# Allegro board KYO_BFHJX_V1.1.brd
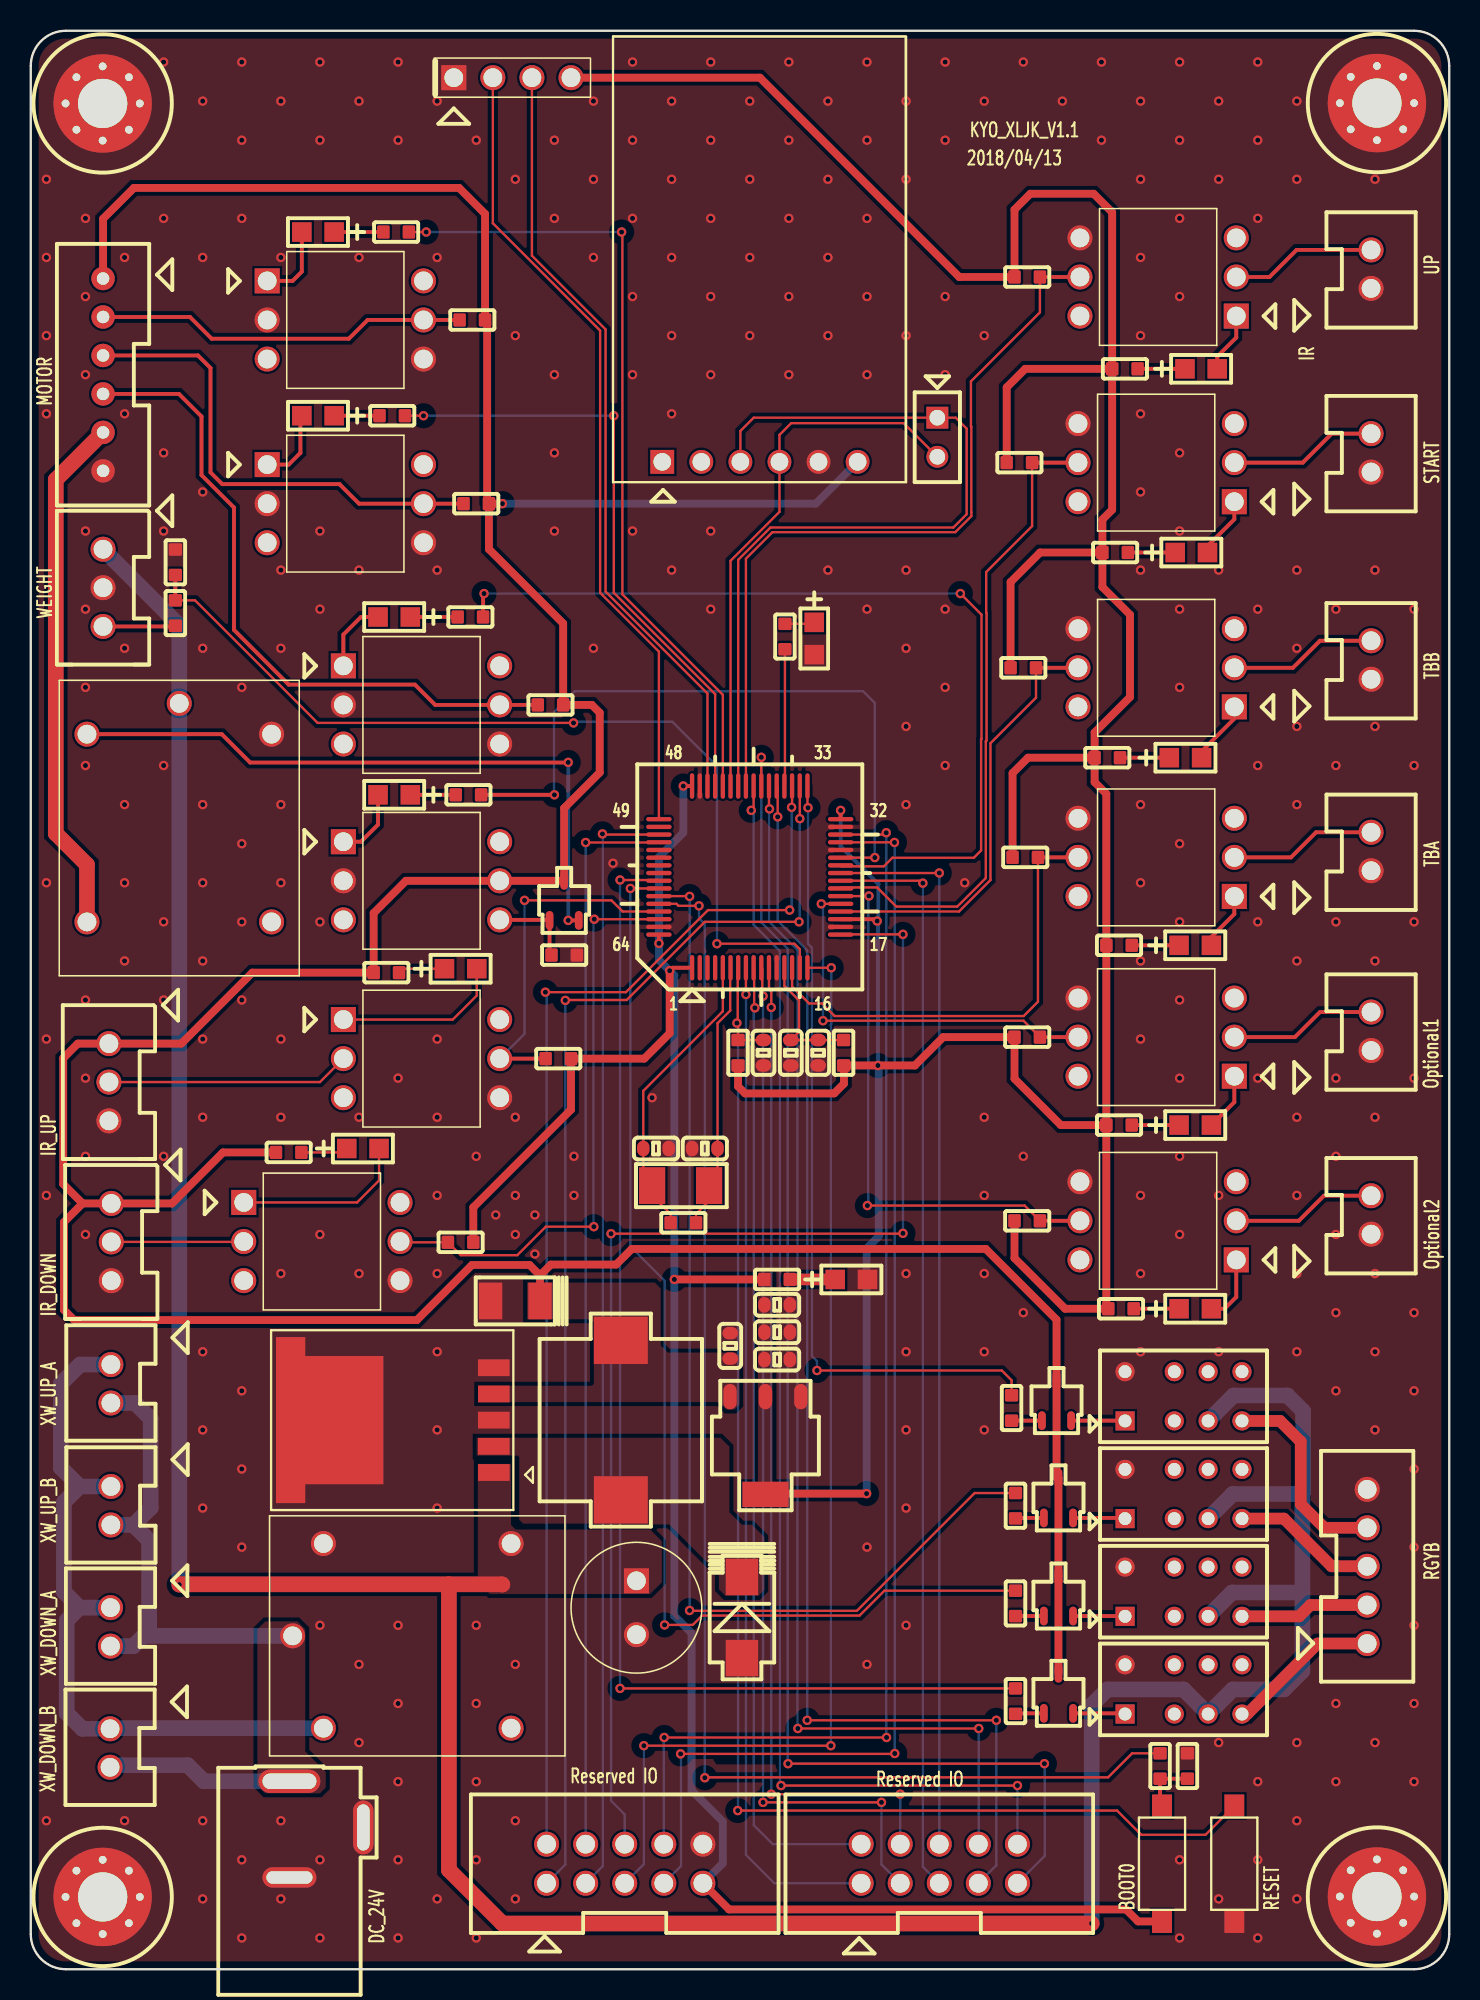
[diagram p0: board, top side]
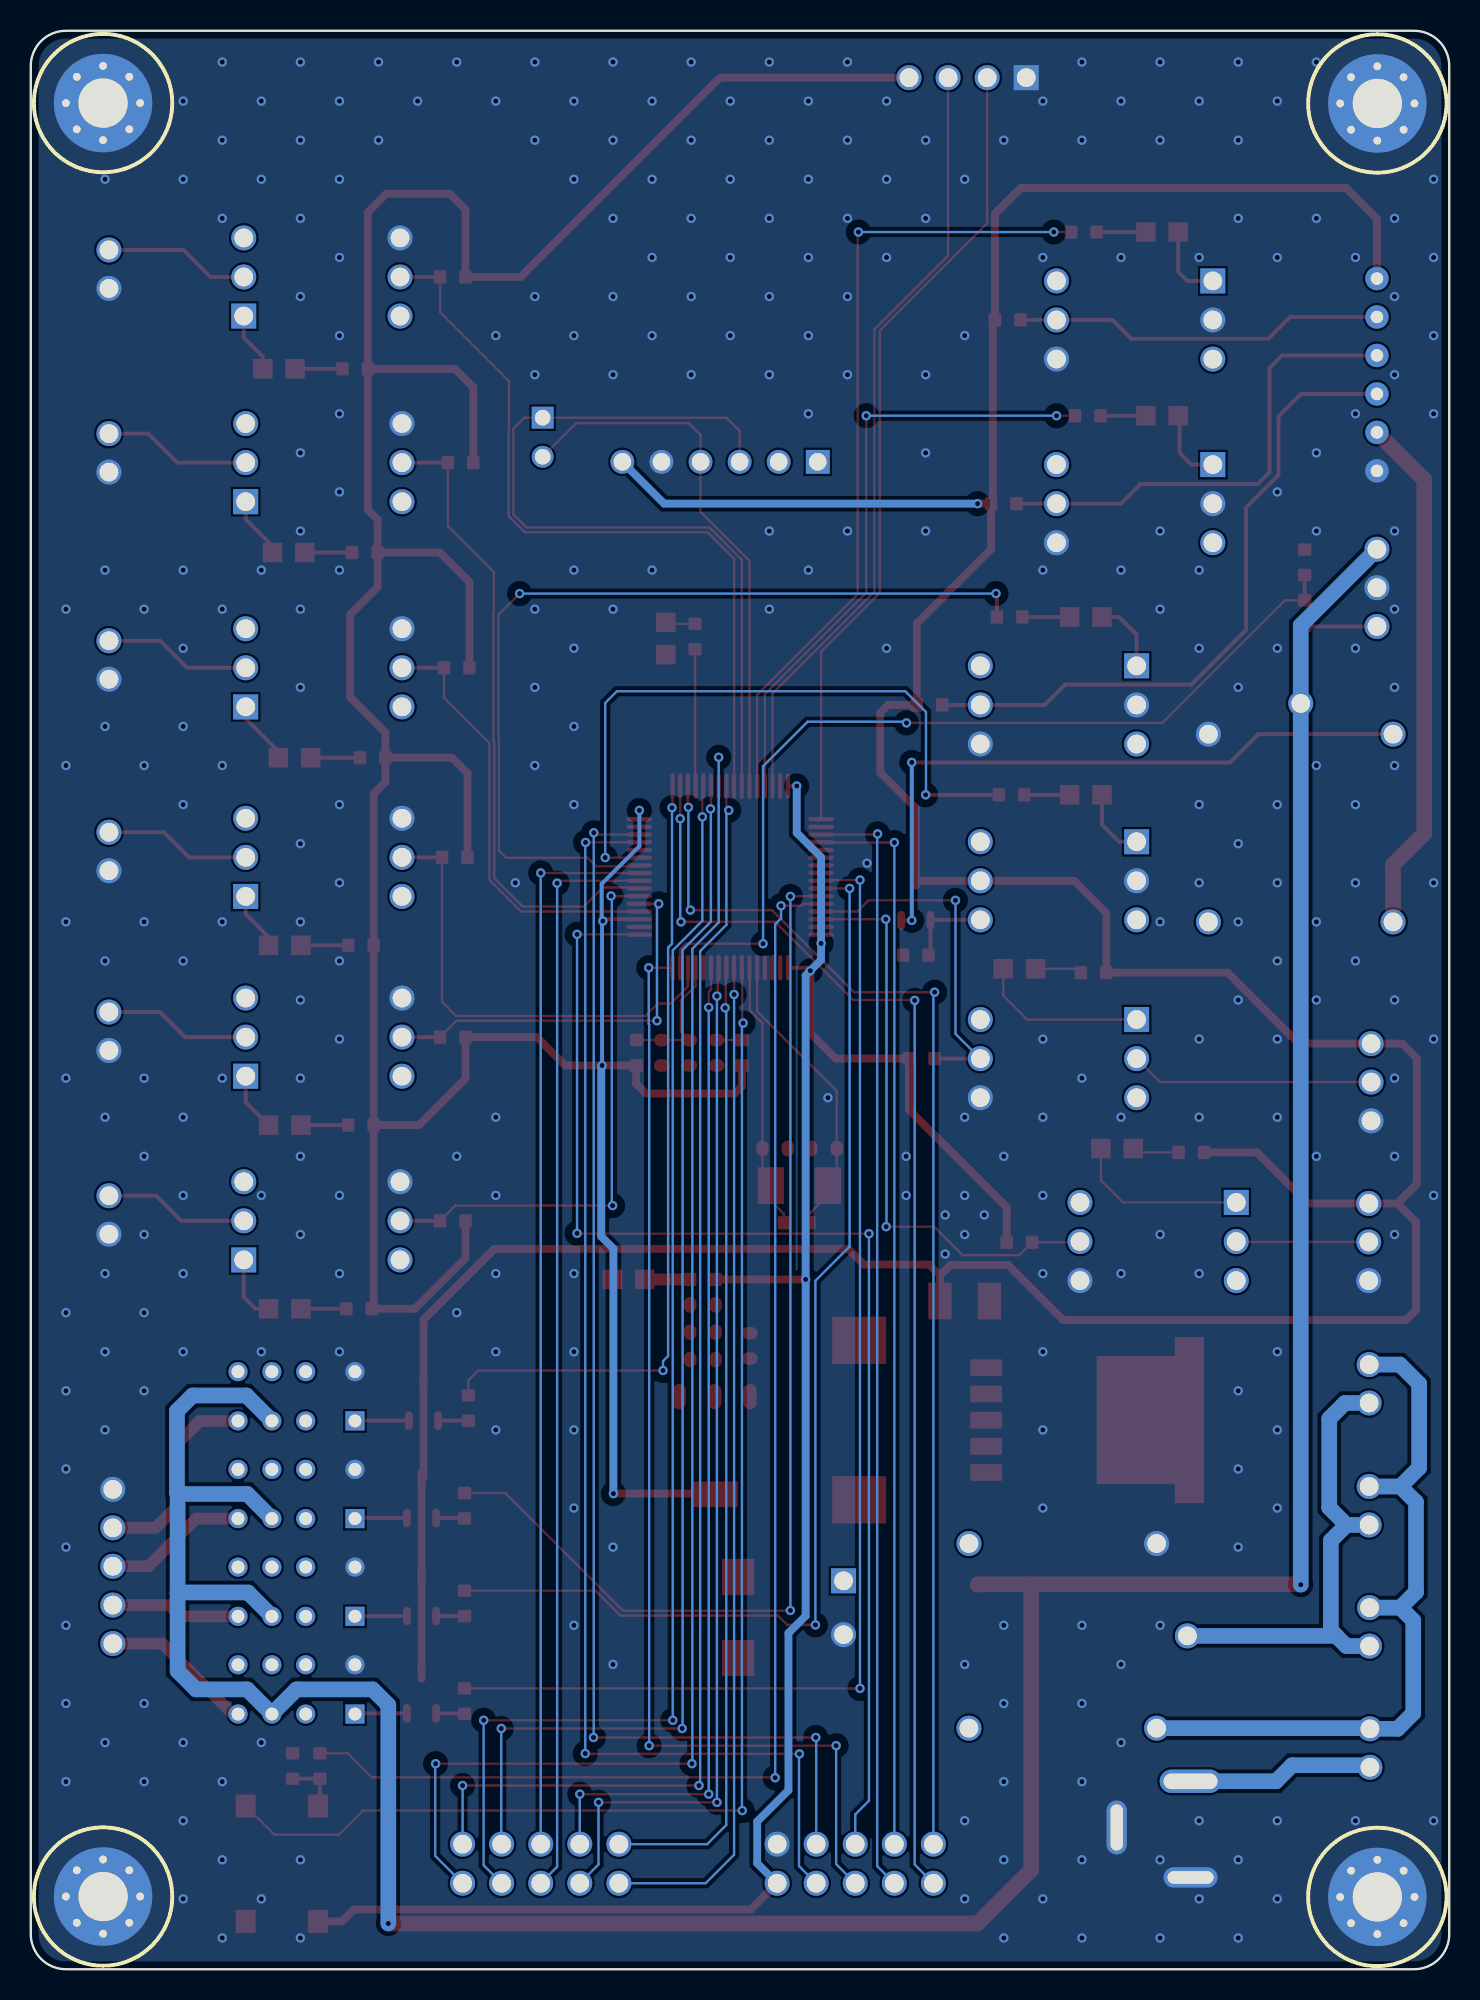
[diagram p1: board, bottom side, seen from below]

Outline 92.2 x 125.98 mm; copper layers: TOP, BOTTOM. Coordinates in mm from the lower left corner of the outline.
Outline path: 0,123.7 arc(0.67,125.31) 2.29,125.98 89.92,125.98 arc(91.53,125.31) 92.2,123.7 92.2,2.29 arc(91.53,0.67) 89.92,0 2.29,0 arc(0.67,0.67) 0,2.29 0,123.7

## Placement (name value [footprint] x y rotation side)
C1  20pF  [C0603]  40.64 53.34 270 top
C2  20pF  [C0603]  43.81 53.34 90 top
C3  0.1uF  [C0603]  47.62 59.56 0 top
C4  680uF  [220UF_35V_35]  39.37 23.5 270 top
C5  220uF  [C_2P_127_138X110]  31.5 43.43 180 top
C6  0.1uF  [C0603]  45.47 40.51 180 top
C7  1uF  [C0603]  48.51 43.18 90 top
C8  0.1uF  [C0603]  48.51 41.4 90 top
C9  0.1uF  [C0603]  48.51 39.62 90 top
C10  0.1uF  [C0603]  49.4 59.56 0 top
C11  1uF  [C0603]  51.18 59.56 0 top
CN1  DCJACK_3  [DC-PWR-JD]  16.81 12.21 270 top
D1  1N5824  [DIODE_2P_175_213X155]  46.23 22.86 180 top
D2  HSMY-C170  [LED_0805]  53.34 44.83 0 top
D3  HSMY-C170  [LED_0805]  50.93 86.49 270 top
D4  HSMY-C170  [LED_0805]  75.69 66.55 0 top
D5  HSMY-C170  [LED_0805]  75.69 54.86 0 top
D6  HSMY-C170  [LED_0805]  75.44 92.08 0 top
D7  HSMY-C170  [LED_0805]  75.06 78.74 0 top
D8  HSMY-C170  [LED_0805]  75.69 42.93 0 top
D9  HSMY-C170  [LED_0805]  76.07 104.01 0 top
D10  HSMY-C170  [LED_0805]  18.67 112.9 180 top
D11  HSMY-C170  [LED_0805]  18.67 100.97 180 top
D12  HSMY-C170  [LED_0805]  23.62 87.88 180 top
D13  HSMY-C170  [LED_0805]  23.62 76.33 180 top
D15  HSMY-C170  [LED_0805]  27.94 65.02 0 top
D16  HSMY-C170  [LED_0805]  21.59 53.34 0 top
H1  -  [H32P64I8-NBS_SMB30]  4.67 4.7 0 top
H2  -  [H32P64I8-NBS_SMB30]  87.5 4.72 0 top
H3  -  [H32P64I8-NBS_SMB30]  87.5 121.29 0 top
H4  -  [H32P64I8-NBS_SMB30]  4.67 121.26 0 top
J1  SW_UP  [XH254_2]  5.16 14.38 270 top
J2  SW_UP  [XH254_2]  5.18 22.25 270 top
J3  -  [XH254_3]  5.08 57.66 270 top
J4  -  [XH254_3]  5.23 47.27 270 top
J5  SW_DOWN  [XH254_2]  5.21 30.12 270 top
J6  SW_DOWN  [XH254_2]  5.21 38.05 270 top
J7  -  [XH254_3]  4.7 89.79 270 top
J8  JTAG_10P  [JTAG_10]  59.05 6.86 90 top
J9  JUMP_2x1  [HD_2X1P_100_D]  58.93 99.57 270 top
J10  JTAG_10P  [JTAG_10]  38.61 6.86 90 top
J11  JUMP_1x4  [HD_1X4_254]  27.5 122.94 0 top
J12  TBA  [XH254_2]  87.12 72.64 90 top
J13  optional1  [XH254_2]  87.12 60.96 90 top
J14  start  [XH254_2]  87.12 98.55 90 top
J15  TBB  [XH254_2]  87.12 85.09 90 top
J16  optional2  [XH254_2]  87.12 49.02 90 top
J17  up  [XH254_2]  87.12 110.49 90 top
J18  -  [XH254_5]  86.87 26.19 90 top
J19  -  [XH254_6]  4.7 103.63 270 top
L1  2.2uH  [INDUCTOR_2P_408_453X406]  38.35 35.69 90 top
NOREF  -  []  30.1 37.39 90 top
NOREF#2  -  []  3.65 68.07 90 top
NOREF#3  -  []  19.43 35.69 0 top
NOREF#4  -  []  4.7 89.79 90 top
NOREF#5  -  []  92.2 2.29 90 top
NOREF#6  -  []  87.12 47.77 90 top
NOREF#7  -  []  5.21 36.8 90 top
NOREF#8  -  []  44.94 49.73 90 top
NOREF#9  -  []  87.12 97.3 90 top
NOREF#10  -  []  19.02 15.67 0 top
NOREF#11  -  []  15.65 80.27 90 top
NOREF#12  -  []  87.12 83.84 90 top
NOREF#13  -  []  3.65 68.07 0 top
NOREF#14  -  []  43.24 49.73 0 top
NOREF#15  -  []  5.08 57.66 90 top
NOREF#16  -  []  5.18 21 90 top
NOREF#17  -  []  31.22 15.67 90 top
NOREF#18  -  []  5.21 28.87 90 top
NOREF#19  -  []  87.12 59.71 90 top
NOREF#20  -  []  17.02 21.67 90 top
NOREF#21  -  []  5.23 47.27 90 top
NOREF#22  -  []  41.24 52.13 0 top
NOREF#23  -  []  3.65 80.27 0 top
NOREF#24  -  []  5.16 13.13 90 top
NOREF#25  -  []  17.02 21.67 0 top
NOREF#26  -  []  78.23 3.11 90 top
NOREF#27  -  []  86.87 21.17 90 top
NOREF#28  -  []  2.29 125.98 0 top
NOREF#29  -  []  87.12 71.39 90 top
NOREF#30  -  []  73.53 3.11 90 top
NOREF#31  -  []  87.12 109.24 90 top
Q1  LM1117IMPX-3.3/NOPB  [SOT-223]  47.75 34.04 180 top
Q2  8550  [SOT-23]  66.8 17.93 90 top
Q3  8550  [SOT-23]  66.8 30.63 90 top
Q4  8550  [SOT-23]  66.8 24.26 90 top
Q5  8550  [SOT-23]  66.68 36.96 90 top
Q6  8550  [SOT-23]  34.67 69.47 90 top
R1  1M  [R0603]  42.42 48.51 90 top
R2  10K  [R0603]  45.97 59.56 180 top
R3  10K  [R0603]  73.41 13.21 180 top
R4  10K  [R0603]  75.18 13.21 180 top
R5  10  [R0603]  52.83 59.56 180 top
R12  10K  [R0603]  9.4 91.44 180 top
R13  10K  [R0603]  9.4 88.14 180 top
R14  1K  [R0603]  48.51 44.83 270 top
R15  1K  [R0603]  49.02 86.61 0 top
R16  10  [R0603]  70.74 66.55 270 top
R17  1K  [R0603]  64.64 72.26 90 top
R18  10  [R0603]  70.74 54.86 270 top
R19  1K  [R0603]  64.77 60.58 90 top
R20  10  [R0603]  70.48 92.08 270 top
R21  1K  [R0603]  64.26 97.92 90 top
R22  10  [R0603]  69.98 78.74 270 top
R23  1K  [R0603]  64.52 84.58 90 top
R24  10  [R0603]  70.87 42.93 270 top
R25  1K  [R0603]  64.77 48.64 90 top
R26  10  [R0603]  71.12 104.01 270 top
R27  1K  [R0603]  64.77 109.98 90 top
R28  10  [R0603]  23.75 112.9 90 top
R29  1K  [R0603]  28.7 107.19 270 top
R30  100  [R0603]  64.01 17.42 180 top
R31  100  [R0603]  64.01 30.12 180 top
R32  10  [R0603]  23.49 100.97 90 top
R33  1K  [R0603]  28.96 95.25 270 top
R34  100  [R0603]  64.01 23.77 180 top
R35  100  [R0603]  63.75 36.47 180 top
R36  10  [R0603]  28.58 87.88 90 top
R37  1K  [R0603]  33.78 82.17 270 top
R38  10  [R0603]  28.45 76.33 90 top
R39  1K  [R0603]  34.67 65.91 90 top
R42  10  [R0603]  23.11 64.77 270 top
R44  10k  [R0603]  34.29 59.18 270 top
R45  10  [R0603]  16.76 53.09 270 top
R46  10k  [R0603]  27.94 47.24 270 top
RELA1  NAIS TX2-5V  [RELAY_G6J-2P-Y]  74.93 18.19 0 top
RELA2  NAIS TX2-5V  [RELAY_G6J-2P-Y]  74.93 30.89 0 top
RELA3  NAIS TX2-5V  [RELAY_G6J-2P-Y]  74.93 24.54 0 top
RELA4  NAIS TX2-5V  [RELAY_G6J-2P-Y]  74.93 37.24 0 top
RELAY1  SDR-5VDC-SL-C  [SRD_05VDC]  25.12 21.67 90 top
RELAY2  SDR-5VDC-SL-C  [SRD_05VDC]  9.65 74.17 0 top
SW1  3*6*5 260g  [SW365]  78.23 6.86 90 top
SW2  3*6*5 260g  [SW365]  73.53 6.86 270 top
U1  STM32F103R8T6  [QFP_64P_20_520X520]  46.74 70.99 0 top
U2  -  [LM2596-5]  19.43 35.69 0 top
U3  ATK-ESP8266  [HD_6X1P_100_D_ESP8266]  48.26 99.44 0 top
U4  4N25  [4N25_6DIP]  73.15 72.26 180 top
U5  4N25  [4N25_6DIP]  73.15 60.58 180 top
U6  4N25  [4N25_6DIP]  73.15 97.92 180 top
U7  4N25  [4N25_6DIP]  73.15 84.58 180 top
U8  4N25  [4N25_6DIP]  73.28 48.64 180 top
U9  4N25  [4N25_6DIP]  73.28 109.98 180 top
U10  4N25  [4N25_6DIP]  20.45 107.19 0 top
U11  4N25  [4N25_6DIP]  20.45 95.25 0 top
U12  4N25  [4N25_6DIP]  25.4 82.17 0 top
U13  4N25  [4N25_6DIP]  25.4 70.74 0 top
U15  4N25  [4N25_6DIP]  25.4 59.18 0 top
U16  4N25  [4N25_6DIP]  18.92 47.29 0 top
Y1  8MHz_20pF  [YSX530GA]  42.24 50.93 180 top

## Library data of the parts
C1-C3 C6-C11 = 11_C_0
C4 C5 = 11_C_POLAR_0
CN1 = 1652_DC-PWR-JA1_0
D1 = 130_TVS_0
D2-D13 D15 D16 = 130_LED_2P_Y_0
H1-H4 = 00_H32P64I8_0
J1 J2 J5 J6 J12-J17 = XH2_1.54
J3 J4 J7 = XH2_4.54
J8 J10 = JUMP_0
J9 J11 = JUMP_1
J18 = XH2_3.54
J19 = XH2_6.54
L1 = 1211_CHOKE_0
Q1 = 131_REG_SOT-223_1
Q2-Q6 = 8550_0
R1-R5 R12-R39 R42 R44-R46 = 10_R_0
RELA1-RELA4 = RELAY DPDT_0
RELAY1 RELAY2 = SRD-5VDC-S-L-C_0
SW1 SW2 = 160_SW_STS-05-A_0
U1 = STM32F103C8T6_6
U2 = ESP8266_3
U3 = ESP8266
U4-U13 U15 U16 = 4N25_0
Y1 = 1231_XTAL_2P_0

## Footprints (pads in the part's own frame, mm; a bottom-side part is the same pattern mirrored in y, then rotated)
4N25_6DIP
  rect 1.626x1.626 hole 1.219: 1(-5.08,2.54)
  round 1.626 hole 1.219: 2(-5.08,0) 3(-5.08,-2.54) 4(5.08,-2.54) 5(5.08,0) 6(5.08,2.54)
220UF_35V_35
  rect 1.626x1.626 hole 1.219: 1(-1.75,0)
  round 1.626 hole 1.219: 2(1.75,0)
C0603
  oval 1.016x0.813 smd: 1(0,0.826) 2(0,-0.826)
C_2P_127_138X110
  rect 1.524x2.388 smd: 1(-1.607,0) 2(1.607,0)
DC-PWR-JD
  oval 1.524x4.013 hole 1.016x3.505: 1(0,0)
  oval 1.321x3.505 hole 0.813x2.997: 2(6.25,0)
  oval 3.505x1.321 hole 2.997x0.813: 3(3,4.8)
DIODE_2P_175_213X155
  rect 2.108x2.362 smd: 1(0,2.635) 2(0,-2.635)
H32P64I8-NBS_SMB30
  round 6.401 hole 3.2 unplated: (0,0)
  round 0.762 hole 0.508: 2(0,2.413) 3(-1.706,1.706) 4(-2.413,0) 5(-1.706,-1.706) 6(0,-2.413) 7(1.706,-1.706) 8(2.413,0) 9(1.706,1.706)
HD_1X4_254
  rect 1.626x1.626 hole 1.219: 1(0,0)
  round 1.626 hole 1.219: 2(2.54,0) 3(5.08,0) 4(7.62,0)
HD_2X1P_100_D
  rect 1.422x1.422 hole 1.016: 1(-1.27,0)
  round 1.422 hole 1.016: 2(1.27,0)
HD_6X1P_100_D_ESP8266
  rect 1.549x1.549 hole 1.143: 1(-7.214,-1.473)
  round 1.549 hole 1.143: 2(-4.674,-1.473) 3(-2.134,-1.473) 4(0.406,-1.473) 5(2.946,-1.473) 6(5.486,-1.473)
INDUCTOR_2P_408_453X406
  rect 3.073x3.505 smd: 1(-5.182,0) 2(5.182,0)
JTAG_10
  round 1.626 hole 1.219: 1(-1.27,5.08) 2(1.27,5.08) 3(-1.27,2.54) 4(1.27,2.54) 5(-1.27,0) 6(1.27,0) 7(-1.27,-2.54) 8(1.27,-2.54) 9(-1.27,-5.08) 10(1.27,-5.08)
LED_0805
  rect 1.27x1.27 smd: 1(-1.05,0) 2(1.05,0)
LM2596-5
  rect 2.057x1.092 smd: 1(10.668,-3.404) 2(10.668,-1.702) 3(10.668,0) 4(10.668,1.702) 5(10.668,3.404)
  custom 6.985x10.795 smd: 6(0,0)
QFP_64P_20_520X520
  oval 0.279x1.651 smd: 1(-3.75,-5.906) 2(-3.25,-5.906) 3(-2.75,-5.906) 4(-2.25,-5.906) 5(-1.75,-5.906) 6(-1.25,-5.906) 7(-0.75,-5.906) 8(-0.25,-5.906) 9(0.25,-5.906) 10(0.75,-5.906) 11(1.25,-5.906) 12(1.75,-5.906) 13(2.25,-5.906) 14(2.75,-5.906) 15(3.25,-5.906) 16(3.75,-5.906) 33(3.75,5.906) 34(3.25,5.906) 35(2.75,5.906) 36(2.25,5.906) 37(1.75,5.906) 38(1.25,5.906) 39(0.75,5.906) 40(0.25,5.906) 41(-0.25,5.906) 42(-0.75,5.906) 43(-1.25,5.906) 44(-1.75,5.906) 45(-2.25,5.906) 46(-2.75,5.906) 47(-3.25,5.906) 48(-3.75,5.906)
  oval 1.651x0.279 smd: 17(5.906,-3.75) 18(5.906,-3.25) 19(5.906,-2.75) 20(5.906,-2.25) 21(5.906,-1.75) 22(5.906,-1.25) 23(5.906,-0.75) 24(5.906,-0.25) 25(5.906,0.25) 26(5.906,0.75) 27(5.906,1.25) 28(5.906,1.75) 29(5.906,2.25) 30(5.906,2.75) 31(5.906,3.25) 32(5.906,3.75) 49(-5.906,3.75) 50(-5.906,3.25) 51(-5.906,2.75) 52(-5.906,2.25) 53(-5.906,1.75) 54(-5.906,1.25) 55(-5.906,0.75) 56(-5.906,0.25) 57(-5.906,-0.25) 58(-5.906,-0.75) 59(-5.906,-1.25) 60(-5.906,-1.75) 61(-5.906,-2.25) 62(-5.906,-2.75) 63(-5.906,-3.25) 64(-5.906,-3.75)
R0603
  custom 0.864x0.812 smd: 1(0,0.826) 2(0,-0.826)
RELAY_G6J-2P-Y
  rect 1.245x1.245 hole 0.838: 1(-3.8,-1.6)
  round 1.245 hole 0.838: 2(-0.6,-1.6) 3(1.6,-1.6) 4(3.8,-1.6) 5(3.8,1.6) 6(1.6,1.6) 7(-0.6,1.6) 8(-3.8,1.6)
SOT-23
  oval 1.219x0.508 smd: 1(-1.302,0.95) 2(-1.302,-0.95) 3(1.302,0)
SOT-223
  oval 0.864x1.651 smd: 1(-2.3,-3.177) 2(0,-3.177) 3(2.3,-3.177)
  rect 2.997x1.651 smd: 4(0,3.177)
SRD_05VDC
  round 1.626 hole 1.219: 1(-6,6.1) 2(0,8.1) 3(6,6.1) 4(6,-6.1) 5(-6,-6.1)
SW365
  rect 1.499x1.295 smd: 1(-3.75,0) 2(3.75,0)
XH254_2
  round 1.626 hole 1.219: 1(-1.25,0) 2(1.25,0)
XH254_3
  round 1.626 hole 1.219: 1(-2.5,0) 2(0,0) 3(2.52,0)
XH254_5
  round 1.626 hole 1.219: 1(-5.02,0) 2(-2.52,0) 3(0,0) 4(2.5,0) 5(5,0)
XH254_6
  round 1.524 hole 0.813: 1(-6.25,0) 2(-3.75,0) 3(-1.25,0) 4(1.25,0) 5(3.75,0) 6(6.25,0)
YSX530GA
  rect 1.702x2.388 smd: 1(-1.851,0) 2(1.851,0)

## Nets
+V3.3: C7.1 C8.1 C9.1 J10.9 J11.4 Q1.2(VOUT1) Q1.4(VOUT2) R2.1 R5.1 R14.2 R16.2 R17.1 R18.2 R19.1 R20.2 R21.1 R22.2 R23.1 R24.2 R25.1 R26.2 R27.1 R44.1 R46.1 SW2.2 U1.1(VBAT) U1.19(VDD_4) U1.32(VDD_1) U1.48(VDD_2) U1.64(VDD_3)
+V5: C5.1 C6.1 J3.1(GND) J4.1(GND) J19.1(GND) L1.2 Q1.3(VIN) Q2.3 Q3.3 Q4.3 Q5.3 Q6.3 R29.1 R33.1 R37.1 R42.2 R45.2 U2.4(FEED BACK) U3.6(VCC) U13.5
+V24: C4.1 J7.1(GND) RELA1.3(COMMON2) RELA2.3(COMMON2) RELA3.3(COMMON2) RELA4.3(COMMON2) RELAY1.4(3) RELAY2.2(4) U2.1(VIN)
GND: C1.1 C2.1 C3.2 C4.2 C5.2 C6.2 C7.2 C8.2 C9.2 C10.2 C11.2 CN1.2(SIDE) CN1.3(LEAF) D1.1(ANODE) D2.2(CATHODE) D3.2(CATHODE) H1.2(GND_2) H1.3(GND_3) H1.4(GND_4) H1.5(GND_5) H1.6(GND_6) H1.7(GND_7) H1.8(GND_8) H1.9(GND_9) H2.2(GND_2) H2.3(GND_3) H2.4(GND_4) H2.5(GND_5) H2.6(GND_6) H2.7(GND_7) H2.8(GND_8) H2.9(GND_9) H3.2(GND_2) H3.3(GND_3) H3.4(GND_4) H3.5(GND_5) H3.6(GND_6) H3.7(GND_7) H3.8(GND_8) H3.9(GND_9) H4.2(GND_2) H4.3(GND_3) H4.4(GND_4) H4.5(GND_5) H4.6(GND_6) H4.7(GND_7) H4.8(GND_8) H4.9(GND_9) J3.3 J4.3 J7.2 J10.10 J11.1 J12.1 J13.1 J14.1 J15.1 J16.1 J17.1 J18.5 J19.6 Q1.1(ADJ/GND) R4.2 R12.2 R39.2 RELA1.8(COIL1) RELA2.8(COIL1) RELA3.8(COIL1) RELA4.8(COIL1) RELAY1.3(2) RELAY2.3(2) SW1.1 U1.12(VSSA) U1.18(VSS_4) U1.28(PB2/BOOT1) U1.31(VSS_1) U1.47(VSS_2) U1.63(VSS_3) U2.3(GROUND) U2.5(O\N\/OFF) U2.6(GROUND_1) U3.5(GND) U4.4 U5.4 U6.4 U7.4 U8.4 U9.4 U10.2 U10.4 U11.2 U11.4 U12.2 U12.4 U13.2 U15.4 U16.4
ADC: R12.1 R13.2 U1.15(PA1/ADC12_IN1)
B0: R3.1 R4.1 SW2.1
BEEP: J18.4 RELA4.4(NO2)
DC_+V24: J1.1 J2.1 J5.1 J6.1 RELAY1.1
DC_IN: CN1.1(CENTER) J1.2 J2.2 J5.2 J6.2 RELAY1.2(4)
DIR: J19.4 R37.2 U12.5
ENA: J19.2 R29.2 U10.5
GREEN: J18.2 RELA3.4(NO2)
IR_DOWN: R46.2 U1.62(PB9) U16.5
IR_OUT_A: J3.2 U15.2
IR_OUT_B: J4.2 U16.2
IR_UP: R44.2 U1.61(PB8) U15.5
LOCK: J19.5 RELAY2.5
MCU_BEEP: R35.2 U1.33(PB12)
MCU_DIR: R36.2 U1.26(PB0)
MCU_ENA: R28.2 U1.44(PA11)
MCU_GREEN: R34.2 U1.58(PB6)
MCU_LOCK: R38.2 U1.27(PB1)
MCU_OPTIONAL1: R19.2 U1.21(PA5) U5.5
MCU_OPTIONAL2: R25.2 U1.22(PA6) U8.5
MCU_PUL: R32.2 U1.45(PA12)
MCU_RED: R30.2 U1.57(PB5)
MCU_START: R21.2 U1.23(PA7) U6.5
MCU_TBA: R17.2 U1.14(PA0-WKUP) U4.5
MCU_TBB: R23.2 U1.20(PA4) U7.5
MCU_UP: R27.2 U1.41(PA8) U9.5
MCU_YELLOW: R31.2 U1.59(PB7)
PB13: J10.1 U1.34(PB13)
PB14: J10.2 U1.35(PB14)
PB15: R15.2 U1.36(PB15)
PC0: J8.1 U1.8(PC0)
PC1: J8.2 U1.9(PC1)
PC2: J8.3 U1.10(PC2)
PC3: J8.4 U1.11(PC3)
PC4: J8.5 U1.24(PC4)
PC5: J8.6 U1.25(PC5)
PC6: J8.7 U1.37(PC6)
PC7: J8.8 U1.38(PC7)
PC8: J8.9 U1.39(PC8)
PC9: J8.10 U1.40(PC9)
PC10: J10.3 U1.51(PC10)
PC11: J10.4 U1.52(PC11)
PUL: J19.3 R33.2 U11.5
RED: J18.1(GND) RELA1.4(NO2)
RESET: C3.1 R2.2 SW1.2 U1.7(NRST)
START: J14.2 U6.2
SWC: J11.2 U1.49(PA14/JTCK/SWCLK)
SWD: J11.3 U1.46(PA13/JTMS/SWDIO)
TBA: J12.2 U4.2
TBB: J15.2 U7.2
U_RXD: J9.1 U1.42(PA9/USART1_TX) U3.3(RXD)
U_TXD: J9.2 U1.43(PA10/USART1_RX) U3.4(TXD)
UP: J17.2 U9.2
USART2_RX: J10.6 U1.17(PA3/USART2_RX)
USART2_TX: J10.5 U1.16(PA2/USART2_TX)
USART3_RX: J10.8 U1.30(PB11/USART3_RX)
USART3_TX: J10.7 U1.29(PB10/USART3_TX)
YELLOW: J18.3 RELA2.4(NO2)
N16456667: D7.2(CATHODE) U7.1
N16456709: D7.1(ANODE) R22.1
N16456819: D4.2(CATHODE) U4.1
N16456841: D4.1(ANODE) R16.1
N16457219: D8.2(CATHODE) U8.1
N16457285: D8.1(ANODE) R24.1
N16457289: J16.2 U8.2
N16457395: D5.2(CATHODE) U5.1
N16457399: D5.1(ANODE) R18.1
N16457403: J13.2 U5.2
N16457907: D9.2(CATHODE) U9.1
N16457973: D9.1(ANODE) R26.1
N16458083: D6.2(CATHODE) U6.1
N16458087: D6.1(ANODE) R20.1
N16459073: D11.2(CATHODE) U11.1
N16459095: D11.1(ANODE) R32.1
N16459299: D12.2(CATHODE) U12.1
N16459303: D12.1(ANODE) R36.1
N16459523: D10.2(CATHODE) U10.1
N16459527: D10.1(ANODE) R28.1
N16465357: Q3.2 RELA2.1(COIL2)
N16465412: Q3.1 R31.1
N16465705: Q5.2 RELA4.1(COIL2)
N16465753: Q5.1 R35.1
N16465945: Q2.2 RELA1.1(COIL2)
N16465993: Q2.1 R30.1
N16466188: Q4.2 RELA3.1(COIL2)
N16466236: Q4.1 R34.1
N16759617: C2.2 R1.2 U1.6(PD1 OSC_OUT) Y1.1
N16759621: C1.2 R1.1 U1.5(PD0 OSC_IN) Y1.2
N16759765: R3.2 U1.60(BOOT0)
N16760065: C10.1 C11.1 R5.2 U1.13(VDDA)
N16763145: D2.1(ANODE) R14.1
N16763149: D3.1(ANODE) R15.1
N16764745: D1.2(CATHODE) L1.1 U2.2(OUTPUT)
N16765523: J7.3 R13.1
N16779117: Q6.1 R39.1 U13.4
N16779175: D13.2(CATHODE) U13.1
N16779177: D13.1(ANODE) R38.1
N16779199: Q6.2 RELAY2.1
N16784786: D15.1(ANODE) R42.1
N16784848: D15.2(CATHODE) U15.1
N16786498: D16.1(ANODE) R45.1
N16786512: D16.2(CATHODE) U16.1

Pads without a net: RELA1 2 5 6 7; RELA2 2 5 6 7; RELA3 2 5 6 7; RELA4 2 5 6 7; RELAY1 5; RELAY2 4; U1 2 3 4 50 53 54 55 56; U3 1 2; U4 3 6; U5 3 6; U6 3 6; U7 3 6; U8 3 6; U9 3 6; U10 3 6; U11 3 6; U12 3 6; U13 3 6; U15 3 6; U16 3 6

## Via types
v1: diameter 0.61, hole 0.33, TOP to BOTTOM, 386 vias

## Routing (per net, layer and track width the routed paths; a pad name or vN(x,y) marks a point on that pad's centre or on a via; arc(x,y) is an arc through that point)
+V3.3: length 391.6
  TOP w0.254: U1.32 v1(52.64,75.31) ; U1.64 v1(40.83,66.67) ; U1.19 54.9,68.24 v1(55.02,68.12) ; U1.1 41.72,65.09 v1(41.53,64.9) ; U1.48 v1(42.41,76.9)
  TOP w0.508: v1(54.33,30.91) 47.8,30.91 Q1.4 ; R26.2 70.29,94.86 69.66,94.22 R20.2 ; R26.2 64.64,104.01 63.44,102.81 R21.1 ; R26.2 70.29,114.19 69.09,115.39 64.97,115.39 63.94,114.36 R27.1 60.35,109.98 47.4,122.94 J11.4 ; R2.1 45.97,57.38 46.43,56.92 52.22,56.92 52.86,57.56 52.86,58.71 R5.1 v1(55.07,58.74) 57.47,58.74 59.31,60.58 R19.1 63.94,57.87 66.95,54.86 R18.2 ; R20.2 65.61,92.08 63.69,90.16 R23.1 ; R20.2 69.66,89.83 71.45,88.04 71.45,82.68 69.15,80.38 R22.2 ; R22.2 64.82,78.74 63.82,77.74 R17.1 ; R22.2 69.15,77.15 69.91,76.39 R16.2 R18.2 ; v1(41.53,64.9) 41.53,60.83 39.88,59.18 R44.1 35.12,55.87 28.77,49.52 R46.1 ; SW2.2 71.97,3.11 71.2,3.89 45.39,3.89 J10.9 ; R25.1 63.94,46.22 67.23,42.93 R24.2 69.91,43.05 R18.2 ; R14.2 v1(41.83,44.83)
  TOP w0.762: 47.69,44.83 R14.2
  BOTTOM w0.254: v1(55.07,58.74) 55.07,68.07 v1(55.02,68.12) 55.09,68.2 55.09,70.54 52.64,72.99 v1(52.64,75.31)
  BOTTOM w0.508: v1(54.33,30.91) 54.33,46.84 55.12,47.63 55.12,58.69 v1(55.07,58.74) ; v1(42.41,76.9) 42.41,73.86 40.83,72.28 v1(40.83,66.67) 40.83,65.6 v1(41.53,64.9) 41.83,64.59 v1(41.83,44.83) 41.83,22.96 42.95,21.84 42.95,11.63 44.98,9.6 44.98,6.88 J10.9
+V5: length 268.7
  TOP w0.508: 4.7,109.88 4.7,113.77 6.71,115.77 27.84,115.77 29.53,114.08 R29.1 29.67,107.05 29.67,95.36 R33.1 ; v1(30.66,95.25) R33.1 ; R33.1 29.78,92.29 34.61,87.46 R37.1 36.47,82.17 36.98,81.66 36.98,77.77 34.67,75.46 Q6.3 34.64,70.74 U13.5 24.38,70.74 22.29,68.64 R42.2 14.4,64.77 9.79,60.16 J3.1 3.06,60.16 2.11,59.21 2.11,51.03 3.37,49.77 ; 3.37,49.77 J4.1 9.18,49.77 12.5,53.09 R45.2 ; 3.37,49.77 2.16,48.56 2.16,42.85 2.82,42.19 25.1,42.19 28.68,45.77 32.42,45.77 33.1,45.09 ; Q2.3 Q4.3 Q3.3 66.73,31.96 66.68,31.95 Q5.3 66.68,42.21 62.08,46.81 39.07,46.81 38.05,45.8 33.81,45.8 33.1,45.09 ; 33.1,45.09 C5.1
  BOTTOM w0.508: U3.6 51.03,95.25 v1(30.66,95.25)
+V24: length 220.1
  TOP w1.016: 30.66,24.99 30.63,25.02 27.18,25.02 ; v1(9.65,24.99) 9.67,25.02 27.18,25.02 ; 27.18,25.02 27.18,6.45 30.66,2.97 v1(68.96,2.97)
  BOTTOM w1.016: 82.66,30.94 82.7,30.99 82.7,36.27 81.69,37.29 78.18,37.29 RELA4.3 ; 82.66,30.94 82.6,30.89 78.13,30.89 RELA2.3 ; 82.66,30.94 82.66,24.49 ; v1(68.96,2.97) 68.96,17.17 69.98,18.19 74.93,18.19 RELA1.3 78.13,18.19 81.46,18.19 82.66,19.39 82.66,24.49 ; J7.1 9.65,87.34 RELAY2.2 v1(9.65,24.99) ; 82.66,24.49 78.08,24.49 RELA3.3
GND:
  vias: v1(1.02,116.33) v1(1.02,111.25) v1(1.02,106.17) v1(1.02,101.09) v1(1.02,70.61) v1(1.02,60.45) v1(1.02,50.29) v1(1.02,9.65) v1(3.56,113.79) v1(3.56,108.71) v1(3.56,103.63) v1(3.56,93.47) v1(3.56,88.39) v1(3.56,83.31) v1(3.56,78.23) v1(3.56,62.99) v1(3.56,57.91) v1(3.56,52.83) v1(3.56,47.75) v1(6.1,111.25) v1(6.1,101.09) v1(6.1,85.85) v1(6.1,75.69) v1(6.1,70.61) v1(6.1,65.53) v1(6.1,9.65) v1(8.64,123.95) v1(8.64,113.79) v1(8.64,98.55) v1(8.64,93.47) v1(8.64,78.23) v1(8.64,68.07) v1(8.64,62.99) v1(8.64,52.83) v1(11.18,121.41) v1(11.18,111.25) v1(11.18,96.01) v1(11.18,85.85) v1(11.18,75.69) v1(11.18,70.61) v1(11.18,65.53) v1(11.18,60.45) v1(11.18,55.37) v1(11.18,40.13) v1(11.18,35.05) v1(11.18,29.97) v1(11.18,9.65) v1(11.18,4.57) v1(13.72,123.95) v1(13.72,118.87) v1(13.72,113.79) v1(13.72,83.31) v1(13.72,73.15) v1(13.72,68.07) v1(13.72,62.99) v1(13.72,37.59) v1(13.72,32.51) v1(13.72,27.43) v1(13.72,7.11) v1(13.72,2.03) v1(16.26,121.41) v1(16.26,111.25) v1(16.26,90.93) v1(16.26,85.85) v1(16.26,75.69) v1(16.26,70.61) v1(16.26,60.45) v1(16.26,55.37) v1(16.26,45.21) v1(16.26,9.65) v1(16.26,4.57) v1(18.8,123.95) v1(18.8,118.87) v1(18.8,93.47) v1(18.8,88.39) v1(18.8,68.07) v1(18.8,47.75) v1(18.8,22.35) v1(18.8,7.11) v1(18.8,2.03) v1(21.34,121.41) v1(21.34,111.25) v1(21.34,90.93) v1(21.34,55.37) v1(21.34,45.21) v1(21.34,19.81) v1(21.34,14.73) v1(23.88,123.95) v1(23.88,118.87) v1(23.88,57.91) v1(23.88,22.35) v1(23.88,17.27) v1(23.88,12.19) v1(23.88,7.11) v1(23.88,2.03) v1(26.42,121.41) v1(26.42,111.25) v1(26.42,90.93) v1(26.42,60.45) v1(26.42,55.37) v1(26.42,50.29) v1(26.42,45.21) v1(26.42,40.13) v1(26.42,35.05) v1(26.42,29.97) v1(26.42,4.57) v1(28.96,118.87) v1(28.96,52.83) v1(28.96,22.35) v1(28.96,17.27) v1(28.96,12.19) v1(28.96,7.11) v1(28.96,2.03) v1(30.23,49.02) v1(31.5,116.33) v1(31.5,106.17) v1(31.5,55.37) v1(31.5,50.29) v1(31.5,47.75) v1(31.5,19.81) v1(31.5,9.65) v1(31.5,4.57) v1(32.77,49.02) v1(32.77,46.48) v1(34.04,118.87) v1(34.04,113.79) v1(34.04,103.63) v1(34.04,98.55) v1(34.04,93.47) v1(35.31,52.83) v1(35.31,50.29) v1(36.58,121.41) v1(36.58,116.33) v1(36.58,111.25) v1(36.58,85.85) v1(37.85,71.88) v1(39.12,123.95) v1(39.12,118.87) v1(39.12,113.79) v1(39.12,108.71) v1(39.12,103.63) v1(39.12,93.47) v1(40.39,56.64) v1(41.66,121.41) v1(41.66,116.33) v1(41.66,111.25) v1(41.66,106.17) v1(41.66,101.09) v1(41.66,90.93) v1(44.2,123.95) v1(44.2,118.87) v1(44.2,113.79) v1(44.2,108.71) v1(44.2,103.63) v1(44.2,93.47) v1(44.2,88.39) v1(46.74,121.41) v1(46.74,116.33) v1(46.74,111.25) v1(46.74,106.17) v1(49.28,123.95) v1(49.28,118.87) v1(49.28,113.79) v1(49.28,108.71) v1(49.28,103.63) v1(51.82,121.41) v1(51.82,116.33) v1(51.82,111.25) v1(51.82,106.17) v1(51.82,90.93) v1(54.36,123.95) v1(54.36,118.87) v1(54.36,113.79) v1(54.36,108.71) v1(54.36,103.63) v1(54.36,88.39) v1(54.36,27.43) v1(54.36,19.81) v1(56.9,121.41) v1(56.9,116.33) v1(56.9,106.17) v1(56.9,90.93) v1(56.9,85.85) v1(56.9,80.77) v1(56.9,75.69) v1(56.9,45.21) v1(56.9,40.13) v1(56.9,35.05) v1(56.9,29.97) v1(56.9,22.35) v1(59.44,123.95) v1(59.44,118.87) v1(59.44,108.71) v1(59.44,103.63) v1(59.44,88.39) v1(59.44,83.31) v1(59.44,78.23) v1(60.71,70.61) v1(61.98,121.41) v1(61.98,106.17) v1(61.98,55.37) v1(61.98,50.29) v1(61.98,45.21) v1(61.98,40.13) v1(61.98,35.05) v1(64.52,123.95) v1(64.52,52.83) v1(64.52,42.67) v1(67.06,121.41) v1(69.6,123.95) v1(69.6,118.87) v1(72.14,121.41) v1(72.14,116.33) v1(72.14,111.25) v1(72.14,106.17) v1(72.14,101.09) v1(72.14,96.01) v1(72.14,90.93) v1(72.14,75.69) v1(72.14,70.61) v1(72.14,65.53) v1(72.14,60.45) v1(72.14,50.29) v1(72.14,45.21) v1(72.14,40.13) v1(74.68,123.95) v1(74.68,118.87) v1(74.68,113.79) v1(74.68,108.71) v1(74.68,98.55) v1(74.68,93.47) v1(74.68,88.39) v1(74.68,83.31) v1(74.68,73.15) v1(74.68,68.07) v1(74.68,62.99) v1(74.68,57.91) v1(74.68,52.83) v1(74.68,47.75) v1(74.68,7.11) v1(74.68,2.03) v1(77.22,121.41) v1(77.22,116.33) v1(77.22,90.93) v1(77.22,50.29) v1(77.22,40.13) v1(77.22,14.73) v1(77.22,4.57) v1(79.76,123.95) v1(79.76,118.87) v1(79.76,113.79) v1(79.76,88.39) v1(79.76,78.23) v1(79.76,68.07) v1(79.76,57.91) v1(79.76,12.19) v1(79.76,7.11) v1(79.76,2.03) v1(82.3,121.41) v1(82.3,116.33) v1(82.3,90.93) v1(82.3,85.85) v1(82.3,80.77) v1(82.3,75.69) v1(82.3,65.53) v1(82.3,55.37) v1(82.3,50.29) v1(82.3,45.21) v1(82.3,40.13) v1(82.3,14.73) v1(82.3,9.65) v1(82.3,4.57) v1(84.84,88.39) v1(84.84,78.23) v1(84.84,68.07) v1(84.84,57.91) v1(84.84,52.83) v1(84.84,47.75) v1(84.84,42.67) v1(84.84,37.59) v1(84.84,17.27) v1(84.84,12.19) v1(87.38,116.33) v1(87.38,90.93) v1(87.38,80.77) v1(87.38,65.53) v1(87.38,55.37) v1(87.38,45.21) v1(87.38,40.13) v1(87.38,35.05) v1(87.38,14.73) v1(89.92,88.39) v1(89.92,78.23) v1(89.92,68.07) v1(89.92,57.91) v1(89.92,42.67) v1(89.92,37.59) v1(89.92,32.51) v1(89.92,27.43) v1(89.92,22.35) v1(89.92,17.27) v1(89.92,12.19)
ADC: length 59.7
  TOP w0.152: v1(35.28,81) 18.64,81 10.68,88.96 R13.2 ; v1(44.6,66.65) 49.63,66.65 49.99,66.29 49.99,65.09 U1.15
  TOP w0.254: R12.1 R13.2
  BOTTOM w0.152: v1(44.6,66.65) 44.6,78.18 41.71,81.08 35.36,81.08 v1(35.28,81)
B0: length 3.6
  TOP w0.254: SW2.1 73.41,10.74 R3.1 R4.1
BEEP: length 13.4
  TOP w0.762: RELA4.4 81.2,35.64 82.55,34.29 82.55,30.23 84.09,28.69 J18.4
DC_+V24: length 48
  BOTTOM w1.016: J6.1 3.21,39.3 1.96,38.05 1.96,32.59 3.17,31.37 ; RELAY1.1 5.2,15.67 J1.1 3.35,15.63 2.34,16.64 2.34,22.66 3.17,23.5 ; 3.17,31.37 J5.1 ; 3.17,31.37 2.16,30.36 2.16,24.52 3.17,23.5 ; 3.17,23.5 J2.1
DC_IN: length 43.9
  BOTTOM w1.016: 6.68,28.87 7.8,29.99 7.8,35.78 6.78,36.8 J6.2 ; 6.68,28.87 J5.2 ; 6.68,28.87 7.7,27.86 7.7,22.02 7.35,21.67 ; 7.35,21.67 RELAY1.2 ; 7.35,21.67 6.68,21 J2.2 ; J1.2 5.29,13.26 10.21,13.26 11.25,12.21 CN1.1
DIR: length 43.5
  TOP w0.254: R37.2 U12.5 26.29,82.17 24.97,83.49 16.76,83.49 13.21,87.05 13.21,95 11.1,97.1 11.1,100.91 9.63,102.38 J19.4
ENA: length 24.3
  TOP w0.254: 4.7,107.38 10.35,107.38 11.76,105.97 20.68,105.97 21.89,107.19 U10.5 R29.2
GREEN: length 8.4
  TOP w0.762: RELA3.4 82.45,22.94 83.18,23.67 J18.2
IR_DOWN: length 38
  TOP w0.152: U16.5 24.05,47.24 R46.2 27.95,46.41 31.62,46.41 33.48,48.26 v1(36.6,48.26) ; U1.62 v1(36.63,68.24)
  BOTTOM w0.152: v1(36.6,48.26) 36.58,48.29 36.58,68.19 v1(36.63,68.24)
IR_OUT_A: length 15.9
  TOP w0.152: J3.2 18.8,57.66 U15.2
IR_OUT_B: length 8.6
  TOP w0.152: U16.2 13.82,47.27 J4.2
IR_UP: length 23
  TOP w0.152: U1.61 38.47,68.74 37.74,69.47 v1(32.09,69.47)
  TOP w0.254: R44.2 U15.5
  BOTTOM w0.152: U15.5 32.09,60.8 v1(32.09,69.47)
LOCK: length 33.9
  TOP w1.016: RELAY2.5 3.65,71.79 1.63,73.81 1.63,96.81 J19.5
MCU_BEEP: length 52.1
  TOP w0.152: v1(51.1,38.91) 63.12,38.91 63.75,38.28 R35.2 ; U1.33 50.49,75.52 v1(50.52,75.49)
  BOTTOM w0.152: v1(50.52,75.49) 50.52,66.65 50.77,66.4 50.77,39.85 51.1,39.52 v1(51.1,38.91)
MCU_DIR: length 59.4
  TOP w0.152: U1.26 52.71,71.68 53.88,71.68 53.88,71.68 55.45,71.68 56.01,72.24 61.3,72.24 61.77,72.71 61.77,79.93 61.8,79.96 61.8,88.04 v1(60.43,89.41)
  TOP w0.254: R36.2 29.4,89.35 v1(29.46,89.41)
  BOTTOM w0.152: v1(60.43,89.41) v1(29.46,89.41)
MCU_ENA: length 52.6
  TOP w0.152: U1.44 44.99,82.83 38.46,89.36 38.46,112.85 v1(38.4,112.9) ; v1(25.7,112.9) R28.2
  BOTTOM w0.152: v1(38.4,112.9) v1(25.7,112.9)
MCU_GREEN: length 74.4
  TOP w0.152: U1.58 v1(38.98,70.24) ; R34.2 55.49,24.6 53.87,22.99 43.64,22.99 43.03,22.38 v1(41.2,22.38)
  BOTTOM w0.152: v1(41.2,22.38) 41.2,44.75 38.98,46.97 v1(38.98,70.24)
MCU_LOCK: length 44.2
  TOP w0.152: v1(54.86,72.25) 54.86,72.24 U1.27
  TOP w0.254: v1(34.04,76.33) R38.2
  BOTTOM w0.152: v1(54.86,72.25) 54.86,82.3 54.1,83.06 35.36,83.06 34.01,81.71 34.01,76.35 v1(34.04,76.33)
MCU_OPTIONAL1: length 25.9
  TOP w0.152: U1.21 v1(51.38,69.24) ; v1(51.5,61.65) 64.53,61.65 R19.2
  TOP w0.254: R19.2 U5.5
  BOTTOM w0.152: v1(51.5,61.65) 51.5,69.13 v1(51.38,69.24)
MCU_OPTIONAL2: length 36.2
  TOP w0.152: v1(54.48,69.75) 54.48,69.74 U1.22 ; v1(54.38,49.63) 64.61,49.63 R25.2
  TOP w0.254: U8.5 R25.2
  BOTTOM w0.152: v1(54.38,49.63) 54.43,49.68 54.43,69.7 v1(54.48,69.75)
MCU_PUL: length 40.4
  TOP w0.152: U1.45 44.49,82.87 37.9,89.46 v1(37.9,100.97) ; v1(25.53,100.97) R32.2
  BOTTOM w0.152: v1(37.9,100.97) v1(25.53,100.97)
MCU_RED: length 80.8
  TOP w0.152: v1(38.3,70.79) 40.78,70.79 U1.57 ; v1(38.3,18.25) R30.2
  BOTTOM w0.152: v1(38.3,18.25) v1(38.3,70.79)
MCU_START: length 42
  TOP w0.152: U1.23 52.71,70.31 53.88,70.31 53.88,70.31 55.02,70.31 56.26,69.06 60.22,69.06 62.08,70.92 62.08,79.81 62.13,79.86 62.13,88.14 62.1,88.16 62.1,90.81 65.09,93.79 R21.2
  TOP w0.254: R21.2 U6.5
MCU_TBA: length 30.4
  TOP w0.152: R17.2 65.47,62.88 64.54,61.95 52.25,61.95 51.44,62.76 50.6,62.76 49.49,63.87 U1.14
  TOP w0.254: R17.2 U4.5
MCU_TBB: length 28.3
  TOP w0.152: U1.20 60.34,68.74 62.38,70.79 62.38,79.68 65.34,82.64 R23.2
  TOP w0.254: R23.2 U7.5
MCU_UP: length 50.6
  TOP w0.152: U1.41 46.49,91.67 48.21,93.4 60.1,93.4 61.14,94.44 61.14,94.69 61.14,100.25 61.11,100.28 61.11,103.2 65.6,107.68 R27.2
  TOP w0.254: R27.2 U9.5
MCU_YELLOW: length 72.8
  TOP w0.152: v1(42.82,69.72) 42.8,69.74 U1.59 ; v1(42.82,23.32) 42.85,23.29 53.7,23.29 61.35,30.95 R31.2
  BOTTOM w0.152: v1(42.82,69.72) v1(42.82,23.32)
PB13: length 84
  TOP w0.152: U1.34 49.99,76.9 v1(49.99,74.78) ; v1(49.94,68.07) 43.81,68.07 38.73,62.99 34.77,62.99 v1(34.75,62.97)
  BOTTOM w0.152: v1(49.99,74.78) 49.99,68.12 v1(49.94,68.07) ; v1(34.75,62.97) 34.75,6.81 J10.1
PB14: length 81.6
  TOP w0.152: v1(49.45,75.51) 49.49,75.55 U1.35 ; v1(33.45,63.5) 38.68,63.5 44.02,68.83 v1(49.33,68.83)
  BOTTOM w0.152: J10.2 33.53,63.42 v1(33.45,63.5) ; v1(49.45,75.51) 49.45,68.96 v1(49.33,68.83)
PB15: length 8.9
  TOP w0.152: R15.2 49.02,76.94 U1.36
PC0: length 65.9
  TOP w0.152: U1.8 v1(46.49,63.35)
  BOTTOM w0.152: v1(46.49,63.35) 46.49,7.44 48.34,5.59 J8.1
PC1: length 63.3
  TOP w0.152: v1(47.07,62.48) 47.02,62.53 47.02,65.05 U1.9
  BOTTOM w0.152: v1(47.07,62.48) 46.99,62.41 46.99,9.37 48.23,8.13 J8.2
PC2: length 67.7
  TOP w0.152: U1.10 47.55,65.02 47.55,63.3 v1(47.6,63.25) ; v1(55.3,10.85) v1(47.6,10.85)
  BOTTOM w0.152: v1(47.6,10.85) v1(47.6,63.25) ; v1(55.3,10.85) 55.3,6.81 J8.3
PC3: length 65.4
  TOP w0.152: U1.11 47.99,63.68 48.13,63.53 v1(48.13,62.51) ; v1(56.52,11.38) v1(48.13,11.38)
  BOTTOM w0.152: v1(56.52,11.38) J8.4 ; v1(48.13,11.38) v1(48.13,62.51)
PC4: length 70.9
  TOP w0.152: U1.24 57.84,70.74 57.99,70.59 v1(57.99,70.59)
  BOTTOM w0.152: v1(57.99,70.59) 57.99,6.65 J8.5
PC5: length 69.5
  TOP w0.152: U1.25 59.05,71.24 v1(59.05,71.25)
  BOTTOM w0.152: v1(59.05,71.25) J8.6
PC6: length 84.9
  TOP w0.152: v1(50.47,16.18) v1(62.76,16.18) ; U1.37 48.55,76.84 v1(48.55,74.89)
  BOTTOM w0.152: v1(50.47,16.18) 50.47,66.22 48.55,68.14 v1(48.55,74.89) ; J8.7 62.76,6.76 v1(62.76,16.18)
PC7: length 81.3
  TOP w0.152: v1(61.62,15.65) v1(49.86,15.65) ; U1.38 47.99,75.52 47.99,75.52 47.99,75.43 v1(48.02,75.41)
  BOTTOM w0.152: v1(61.62,15.65) 61.62,8.15 J8.8 ; v1(49.86,15.65) 49.83,15.67 49.83,66.24 47.99,68.08 47.99,75.39 v1(48.02,75.41)
PC8: length 93.2
  TOP w0.152: v1(49.23,13.36) v1(65.89,13.36) ; U1.39 v1(47.49,78.77)
  BOTTOM w0.152: v1(47.49,78.77) 47.49,75.64 47.48,75.63 47.48,75.19 47.49,75.19 47.49,68.03 49.2,66.32 49.2,13.39 v1(49.23,13.36) ; v1(65.89,13.36) 65.91,13.34 65.91,7.37 J8.9
PC9: length 85
  TOP w0.152: v1(46.83,75.32) 46.99,75.47 U1.40 ; v1(48.77,11.94) v1(64.14,11.94)
  BOTTOM w0.152: v1(46.83,75.32) 46.99,75.16 46.99,67.87 48.69,66.17 48.69,12.01 v1(48.77,11.94) ; J8.10 v1(64.14,11.94)
PC10: length 72.4
  TOP w0.152: v1(37.16,73.79) 37.2,73.74 U1.51
  BOTTOM w0.152: J10.3 37.19,6.71 37.19,73.76 v1(37.16,73.79)
PC11: length 69.9
  TOP w0.152: U1.52 40.82,73.23 v1(36.07,73.23)
  BOTTOM w0.152: v1(36.07,73.23) J10.4
PUL: length 31.4
  TOP w0.254: R33.2 U11.5 21.34,95.25 20.07,96.52 12.45,96.52 11.68,97.28 11.68,104.06 10.87,104.88 J19.3
RED: length 10
  TOP w0.762: J18.1 83.65,21.17 79.07,16.59 RELA1.4
RESET: length 91.3
  TOP w0.152: v1(45.95,10.31) 70.61,10.31 72.19,8.74 76.36,8.74 SW1.2 ; U1.7 45.95,65.05 45.95,61.55 v1(45.9,61.49) 45.97,61.42 R2.2 47.62,60.39 C3.1
  BOTTOM w0.152: v1(45.9,61.49) 45.97,61.42 45.97,10.33 v1(45.95,10.31)
START: length 9.7
  TOP w0.254: J14.2 84.56,99.8 82.68,97.92 U6.2
SWC: length 52.7
  TOP w0.152: J11.2 30.04,113.47 37.01,106.5 37.01,89.46 40.83,85.64 U1.49
SWD: length 50.8
  TOP w0.152: U1.46 43.99,82.91 37.36,89.54 37.36,106.58 32.58,111.37 J11.3
TBA: length 9.6
  TOP w0.254: U4.2 81.91,72.26 83.55,73.89 J12.2
TBB: length 9.6
  TOP w0.254: J15.2 83.8,86.34 82.04,84.58 U7.2
U_RXD: length 53.7
  TOP w0.152: U1.42 45.99,91.6 48.08,93.7 59.97,93.7 60.83,94.56 60.83,100.13 60.12,100.84 J9.1 46.99,100.84 46.13,99.97 U3.3
U_TXD: length 35.6
  TOP w0.152: U1.43 45.49,91.54 48.67,94.72 U3.4 48.67,99.72 49.43,100.48 56.74,100.48 J9.2
UP: length 9.5
  TOP w0.254: U9.2 80.52,109.98 82.28,111.74 J17.2
USART2_RX: length 82.5
  TOP w0.152: v1(37.72,47.8) 56.64,47.8 56.67,47.83 v1(56.69,47.83) ; v1(56.69,67.26) 52.66,67.26 U1.17
  BOTTOM w0.152: J10.6 38.61,10.06 37.72,10.95 v1(37.72,47.8) ; v1(56.69,67.26) v1(56.69,47.83)
USART2_TX: length 73.7
  TOP w0.152: v1(52.01,14.53) v1(39.85,14.53) ; U1.16 v1(52.03,65.09)
  BOTTOM w0.152: v1(52.01,14.53) 52.01,61.4 52.03,61.42 v1(52.03,65.09) ; J10.5 39.85,6.83 v1(39.85,14.53)
USART3_RX: length 83.2
  TOP w0.152: v1(41.17,15.06) v1(55.63,15.06) ; U1.30 55.49,73.74 v1(55.61,73.86)
  BOTTOM w0.152: v1(41.17,15.06) 41.17,15.04 41.15,15.01 J10.8 ; v1(55.61,73.86) 55.61,15.11 55.63,15.09 v1(55.63,15.06)
USART3_TX: length 85.5
  TOP w0.152: v1(56.16,14.02) 56.13,14 v1(42.24,14) ; v1(56.14,73.23) 56.14,73.23 56.13,73.24 U1.29
  BOTTOM w0.152: v1(56.16,14.02) 56.16,73.21 56.14,73.23 v1(56.14,73.23) ; v1(42.24,14) 42.27,13.97 42.27,6.71 J10.7
YELLOW: length 9.4
  TOP w0.762: RELA2.4 81.46,29.29 84.56,26.19 J18.3
N16456667: length 4.2
  TOP w0.254: U7.1 78.23,81.28 76.11,79.16 D7.2
N16456709: length 3.2
  TOP w0.254: D7.1 R22.1
N16456819: length 3.8
  TOP w0.254: D4.2 76.74,67.09 78.23,68.58 U4.1
N16456841: length 3.1
  TOP w0.254: D4.1 R16.1
N16457219: length 4.3
  TOP w0.254: U8.1 78.36,43.69 77.6,42.93 D8.2
N16457285: length 2.9
  TOP w0.254: R24.1 D8.1
N16457289: length 9.4
  TOP w0.254: J16.2 84.05,50.27 82.42,48.64 U8.2
N16457395: length 3.8
  TOP w0.254: D5.2 78.23,56.35 U5.1
N16457399: length 3.1
  TOP w0.254: R18.1 D5.1
N16457403: length 9.6
  TOP w0.254: U5.2 82.17,60.58 83.8,62.21 J13.2
N16457907: length 3.9
  TOP w0.254: U9.1 78.36,106.05 77.12,104.81 D9.2
N16457973: length 3.1
  TOP w0.254: R26.1 D9.1
N16458083: length 4
  TOP w0.254: D6.2 76.49,92.49 78.23,94.23 U6.1
N16458087: length 3.1
  TOP w0.254: R20.1 D6.1
N16459073: length 4.9
  TOP w0.254: D11.2 17.53,100.87 17.53,98.55 16.76,97.79 U11.1
N16459095: length 2.9
  TOP w0.254: D11.1 R32.1
N16459299: length 4.8
  TOP w0.254: 20.32,84.71 20.32,86.74 21.46,87.88 D12.2
N16459303: length 3.1
  TOP w0.254: D12.1 R36.1
N16459523: length 5.1
  TOP w0.254: U10.1 17.02,109.73 17.62,110.33 D10.2
N16459527: length 3.2
  TOP w0.254: D10.1 R28.1
N16465357: length 3.4
  TOP w0.254: RELA2.1 71.09,29.33 Q3.2
N16465412: length 1.9
  TOP w0.254: R31.1 64.04,29.33 Q3.1
N16465705: length 3.5
  TOP w0.254: Q5.2 71.11,35.65 RELA4.1
N16465753: length 2
  TOP w0.254: R35.1 63.76,35.65 Q5.1
N16465945: length 3.4
  TOP w0.254: Q2.2 71.09,16.63 RELA1.1
N16465993: length 1.9
  TOP w0.254: Q2.1 64.04,16.63 R30.1
N16466188: length 3.4
  TOP w0.254: RELA3.1 71.11,22.95 Q4.2
N16466236: length 1.8
  TOP w0.254: R34.1 64.01,22.95 Q4.1
N16759617: length 17.5
  TOP w0.152: R1.2 43.24,49.09 44.09,49.93 Y1.1 44.64,51.48 C2.2 44.64,61.48 45.47,62.31 45.47,65.07 U1.6
N16759621: length 19.5
  TOP w0.152: U1.5 44.99,62.26 39.81,57.09 C1.2 39.81,51.5 Y1.2 40.39,50.29 41.59,49.09 R1.1
N16759765: length 89.7
  TOP w0.152: v1(43.43,69.11) 42.1,69.11 41.97,69.24 U1.60 ; R3.2 71.59,14.03 70.03,12.47 43.84,12.47 v1(43.81,12.45)
  BOTTOM w0.152: v1(43.43,69.11) 43.43,68.3 43.81,67.92 v1(43.81,12.45)
N16760065: length 8.7
  TOP w0.152: U1.13 48.99,63.91 49.09,63.8 49.1,63.8 49.94,62.97 49.94,60.92 C10.1 C11.1 51.18,60.39 R5.2
N16763145: length 2.9
  TOP w0.762: R14.1 D2.1
N16763149: length 1.9
  TOP w0.152: R15.1 50.83,87.44 D3.1
N16765523: length 4.7
  TOP w0.254: R13.1 9.36,87.27 J7.3
N16779117: length 5.6
  TOP w0.254: R39.1 33.72,66.04 Q6.1 33.69,68.2 U13.4
N16779175: length 4.7
  TOP w0.254: U13.1 21.46,73.28 22.57,74.39 D13.2
N16779177: length 2.9
  TOP w0.254: D13.1 R38.1
N16779199: length 43
  TOP w0.254: RELAY2.1 12.42,80.27 14.26,78.43 34.92,78.43 v1(34.94,78.44) ; v1(34.94,68.17) Q6.2
  BOTTOM w0.254: v1(34.94,68.17) v1(34.94,78.44)
N16784786: length 3.1
  TOP w0.152: R42.1 24.19,65.02 D15.1
N16784848: length 11.1
  TOP w0.152: D15.2 28.99,63.28 27.43,61.72 U15.1
N16786498: length 3.1
  TOP w0.152: R45.1 20.29,53.09 D16.1
N16786512: length 11.5
  TOP w0.152: D16.2 22.64,51.27 21.21,49.83 U16.1

## Copper pours and planes (outline as drawn; the poured copper is in the pictures)
+V3.3 on TOP: 47.27,45.21 47.27,30.2 48.21,30.2 48.21,45.19 48.11,45.29 47.35,45.29
+V5 on TOP: 32.26,42.24 36.4,42.24 36.6,42.04 36.6,38.05 36.47,37.92 29.08,37.92 29.08,36.86 44.73,36.86 45.21,36.37 45.75,36.37 46.05,36.68 46.05,39.85 45.82,40.08 41.4,40.08 40.94,40.54 40.94,44.25 40.56,44.63 32.26,44.63
+V24 on TOP: 41.02,25.15 41.02,27.81 40.26,28.57 31.52,28.57 31.22,28.88 31.22,32.84 29.06,32.84 29.06,25.17 29.84,24.38 40.26,24.38
GND on TOP: 89.92,125.48 91.17,124.96 91.69,123.7 91.69,2.29 91.17,1.03 89.92,0.51 2.29,0.51 1.03,1.03 0.51,2.29 0.51,123.7 1.03,124.96 2.29,125.48 ; 8 cut-outs
GND on BOTTOM: 2.29,0.51 1.03,1.03 0.51,2.29 0.51,123.7 1.03,124.96 2.29,125.48 89.92,125.48 91.17,124.96 91.69,123.7 91.69,2.29 91.17,1.03 89.92,0.51 ; 16 cut-outs
DC_IN on TOP: 15.24,11.43 18.8,11.43 19.18,11.81 19.18,12.83 17.84,14.16 17.84,22.1 17.34,22.61 15.24,22.61 14.73,22.1 14.73,11.94
N16764745 on TOP: 36.58,28.96 36.63,28.91 41.5,28.91 44.73,25.68 44.73,24.69 45.16,24.26 47.29,24.26 47.68,24.64 47.68,28.09 46.88,28.89 46.22,28.89 45.42,29.69 45.42,33.96 44.83,34.54 28.98,34.54 28.98,33.38 31.65,33.38 31.75,33.27 31.75,29.21 32,28.96

## Text on the board
Ref Des/Silkscreen Top: Reserved IO | 2018/04/13 | KYO_XLJK_V1.1 | MOTOR | WEIGHT | XW_DOWN_B | IR_UP | IR_DOWN | XW_UP_A | XW_UP_B | XW_DOWN_A | DC_24V | BOOT0 | RESET | IR | Optional1 | UP | START | TBB | TBA | Optional2 | RGYB
BODY_CENTER: FIGURE | SIZE | 13.0 | 20.0 | 32.0 | 33.0 | 40.0 | 45.0 | 47.99 | 125.98 | 118.0x32.0 | 138.0x40.0 | DRILL CHART: TOP to BOTTOM | ALL UNITS ARE IN MILS | TOLERANCE | +0.0/-0.0 | +2.99/-2.99 | PLATED | NON-PLATED | QTY | 386 | 32 | 6 | 2 | 142 | 4 | 1
